# EAGLE board Board (EAGLE 7.1.0)
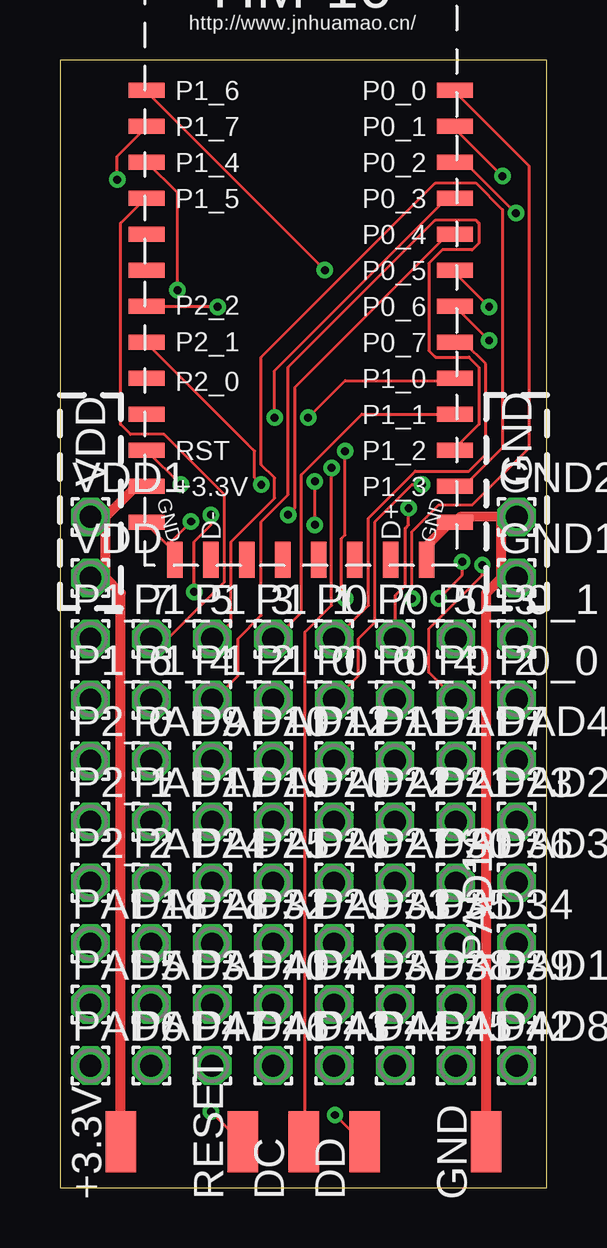
[diagram p0: board, top side]
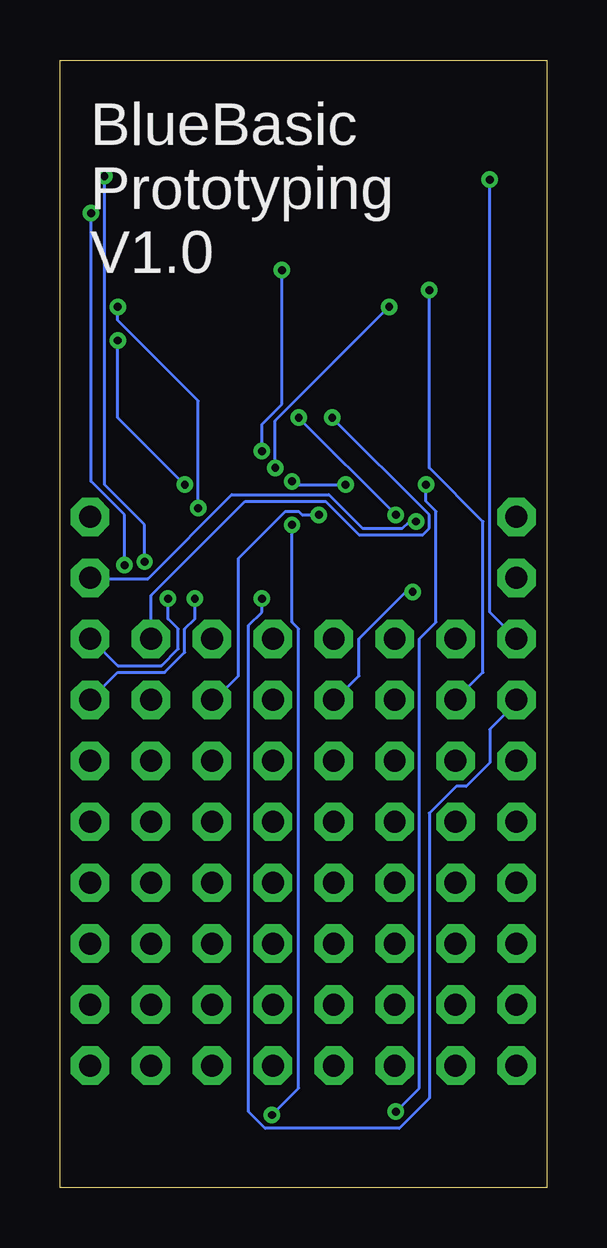
[diagram p1: board, bottom side, seen from below]

Size 20.31 x 46.98 mm. Coordinates in mm from the lower left corner, seen from the top.
Outline: 0,0 20.31,0 20.31,46.98 0,46.98 0,0
Copper layers (1*16): Top 0.0356mm / dielectric 1.5011mm / Bottom 0.0356mm
Design rules "LaenPCBOrder *": minimum track width 5mil, minimum drill 13mil, track to track 6mil, track to pad 6mil, pad to pad 6mil, via to via 6mil, smd to smd 6mil, copper to edge 15mil, drill to drill 6mil, minimum pad ring 7mil, minimum via ring 7mil, stop-mask expansion 3mil, vias tented up to drill 3mil, thermal gap 10mil
vRestrict: area 0,3.8 to 20.3,24.1

## Footprints (pad centres in the part's own frame; a part is rotated, then mirrored left to right if it is on the bottom)
SMD1,27-2,54 = smd 1.27 x 2.54: 1 0,0
26.9X13X2.2_BOARD = smd 1.5 x 0.635: 1 -7.183,0; 2 -7.183,-1.5; 3 -7.183,-3; 4 -7.183,-4.5; 5 -7.183,-6; 6 -7.183,-7.5; 8 -7.183,-10.5; 9 -7.183,-12; 10 -7.183,-13.5; 11 -7.183,-15; 12 -7.183,-16.5; 13 -7.183,-18; 22 5.683,-18; 23 5.683,-16.5; 24 5.683,-15; 25 5.683,-13.5; 26 5.683,-12; 27 5.683,-10.5; 28 5.683,-9; 29 5.683,-7.5; 30 5.683,-6; 31 5.683,-4.5; 32 5.683,-3; 33 5.683,-1.5; 34 5.683,0; $7 -7.183,-9 | smd 0.635 x 1.5: 14 -6,-19.558; 15 -4.5,-19.558; 16 -3,-19.558; 17 -1.5,-19.558; 18 0,-19.558; 19 1.5,-19.558; 20 3,-19.558; 21 4.5,-19.558
1,6/0,9 = drill 0.914 pad 1.6 octagon: 1 0,0

## Placement (x,y rotation side)
+3.3V  [SMD1,27-2,54]  2.54,1.9 0 top
DC  [SMD1,27-2,54]  10.16,1.9 0 top
DD  [SMD1,27-2,54]  12.7,1.9 0 top
E1  HM-10-BOARD  [26.9X13X2.2_BOARD]  10.79,45.72 0 top
GND  [SMD1,27-2,54]  17.78,1.9 0 top
GND1  [1,6/0,9]  19.05,25.4 0 top
GND2  [1,6/0,9]  19.05,27.94 0 top
P0_0  [1,6/0,9]  19.05,20.32 0 top
P0_1  [1,6/0,9]  19.05,22.86 0 top
P0_2  [1,6/0,9]  16.51,20.32 0 top
P0_3  [1,6/0,9]  16.51,22.86 0 top
P0_4  [1,6/0,9]  13.97,20.32 0 top
P0_5  [1,6/0,9]  13.97,22.86 0 top
P0_6  [1,6/0,9]  11.43,20.32 0 top
P0_7  [1,6/0,9]  11.43,22.86 0 top
P1_0  [1,6/0,9]  8.89,20.32 0 top
P1_1  [1,6/0,9]  8.89,22.86 0 top
P1_2  [1,6/0,9]  6.35,20.32 0 top
P1_3  [1,6/0,9]  6.35,22.86 0 top
P1_4  [1,6/0,9]  3.81,20.32 0 top
P1_5  [1,6/0,9]  3.81,22.86 0 top
P1_6  [1,6/0,9]  1.27,20.32 0 top
P1_7  [1,6/0,9]  1.27,22.86 0 top
P2_0  [1,6/0,9]  1.27,17.78 0 top
P2_1  [1,6/0,9]  1.27,15.24 0 top
P2_2  [1,6/0,9]  1.27,12.7 0 top
PAD1  [1,6/0,9]  13.97,17.78 0 top
PAD2  [1,6/0,9]  19.05,15.24 0 top
PAD3  [1,6/0,9]  19.05,12.7 0 top
PAD4  [1,6/0,9]  19.05,17.78 0 top
PAD5  [1,6/0,9]  1.27,7.62 0 top
PAD6  [1,6/0,9]  1.27,5.08 0 top
PAD7  [1,6/0,9]  16.51,17.78 0 top
PAD8  [1,6/0,9]  19.05,5.08 0 top
PAD9  [1,6/0,9]  3.81,17.78 0 top
PAD10  [1,6/0,9]  6.35,17.78 0 top
PAD11  [1,6/0,9]  11.43,17.78 0 top
PAD12  [1,6/0,9]  8.89,17.78 0 top
PAD15  [1,6/0,9]  19.05,7.62 0 top
PAD16  [1,6/0,9]  19.05,10.16 90 top
PAD17  [1,6/0,9]  3.81,15.24 0 top
PAD18  [1,6/0,9]  1.27,10.16 0 top
PAD19  [1,6/0,9]  6.35,15.24 0 top
PAD20  [1,6/0,9]  8.89,15.24 0 top
PAD21  [1,6/0,9]  13.97,15.24 0 top
PAD22  [1,6/0,9]  11.43,15.24 0 top
PAD23  [1,6/0,9]  16.51,15.24 0 top
PAD24  [1,6/0,9]  3.81,12.7 0 top
PAD25  [1,6/0,9]  6.35,12.7 0 top
PAD26  [1,6/0,9]  8.89,12.7 0 top
PAD27  [1,6/0,9]  11.43,12.7 0 top
PAD28  [1,6/0,9]  3.81,10.16 0 top
PAD29  [1,6/0,9]  8.89,10.16 0 top
PAD30  [1,6/0,9]  13.97,12.7 0 top
PAD31  [1,6/0,9]  3.81,7.62 0 top
PAD32  [1,6/0,9]  6.35,10.16 0 top
PAD33  [1,6/0,9]  11.43,10.16 0 top
PAD34  [1,6/0,9]  16.51,10.16 0 top
PAD35  [1,6/0,9]  13.97,10.16 0 top
PAD36  [1,6/0,9]  16.51,12.7 0 top
PAD37  [1,6/0,9]  11.43,7.62 0 top
PAD38  [1,6/0,9]  13.97,7.62 0 top
PAD39  [1,6/0,9]  16.51,7.62 0 top
PAD40  [1,6/0,9]  6.35,7.62 0 top
PAD41  [1,6/0,9]  8.89,7.62 0 top
PAD42  [1,6/0,9]  16.51,5.08 0 top
PAD43  [1,6/0,9]  8.89,5.08 0 top
PAD44  [1,6/0,9]  11.43,5.08 0 top
PAD45  [1,6/0,9]  13.97,5.08 0 top
PAD46  [1,6/0,9]  6.35,5.08 0 top
PAD47  [1,6/0,9]  3.81,5.08 0 top
RESET  [SMD1,27-2,54]  7.62,1.9 0 top
VDD  [1,6/0,9]  1.27,25.4 0 top
VDD1  [1,6/0,9]  1.27,27.94 0 top

## Library data of the parts
+3.3V DC DD GND GND1 GND2 P0_0 P0_1-P0_7 P1_0 P1_1-P1_7 P2_0 P2_1 P2_2 PAD1-PAD12 PAD15-PAD47 RESET VDD VDD1 = wirepad
E1 = JHNuaMao

## Nets
GND: E1.13 E1.14 E1.21 E1.22 GND1.1 GND2.1 GND.1
N$1: E1.28 P0_6.1
N$2: E1.27 P0_7.1
N$3: E1.11 RESET.1
N$4: DC.1 E1.$7
N$5: DD.1 E1.8
N$6: E1.23 P1_3.1
N$7: E1.24 P1_2.1
N$8: E1.25 P1_1.1
N$9: E1.31 P0_3.1
N$10: E1.30 P0_4.1
N$11: E1.29 P0_5.1
N$12: E1.26 P1_0.1
N$13: E1.2 P1_7.1
N$14: E1.1 P1_6.1
N$15: E1.4 P1_5.1
N$16: E1.3 P1_4.1
N$18: E1.32 P0_2.1
P0_0: E1.34 P0_0.1
P0_1: E1.33 P0_1.1
VDD: +3.3V.1 E1.12 VDD1.1 VDD.1

## Tracks (layer width: path | path; a pad name or v marks a point on that pad's centre or on a via)
GND  (via drill 0.33)
  Top 0.127: 4.48,26.77 3.65,27.61 E1.13 | 4.48,26.77 4.76,26.49 4.76,26.21 E1.14 4.48,26.77 | 15.24,26.67 15.24,26.21 E1.21 | 18.41,25.4 18.59,25.38 19.01,25.38 GND1.1 | v5.46,27.75 4.48,26.77 | GND2.1 19.01,28.03 18.59,28.03 18.41,27.94
  Top 0.406: GND.1 17.78,24.76 18.41,25.4 18.41,27.94 16.7,27.94 E1.22 16.29,27.72 15.24,26.67
  Bottom 0.127: v5.46,27.75 5.74,27.75 6.02,27.47 7.7,27.47 9.09,28.87 13.14,28.87 16.64,25.38 19.01,25.38 GND1.1
N$1  (via drill 0.33)
  Top 0.127: v17.89,35.29 16.5,36.69 E1.28 | v15.1,29.29 14.68,29.29 13.14,27.75 13.14,23.56 12.45,22.86 12.45,21.32 11.47,20.34 P0_6.1
  Bottom 0.127: v17.89,35.29 17.89,32.08 v15.1,29.29
N$2
  Top 0.127: E1.27 16.5,35.15 16.92,35.15 17.75,34.31 17.75,30.54 17.06,29.84 14.82,29.84 12.87,27.89 12.87,24.26 11.47,22.86 P0_7.1
N$3  (via drill 0.33)
  Top 0.127: v5.04,29.29 3.65,30.68 E1.11 | v6.3,3.16 7.56,1.9 RESET.1
  Bottom 0.127: v5.04,29.29 5.04,28.59 4.62,28.17 4.62,23.56 5.32,22.86 5.32,4.14 v6.3,3.16
N$4  (via drill 0.33)
  Top 0.127: v6.58,36.69 3.65,36.69 E1.$7 | v11.33,29.98 11.33,24.26 10.21,23.14 10.21,1.9 DC.1
  Bottom 0.127: v6.58,36.69 11.33,31.94 v11.33,29.98
N$5  (via drill 0.33)
  Top 0.127: v8.39,29.29 8.12,29.57 8.12,30.68 3.65,35.15 E1.8 | v10.63,27.61 v10.63,29.43 | v11.47,3.02 12.59,1.9 DD.1
  Bottom 0.127: v8.39,29.29 10.49,29.29 v10.63,29.43 | v10.63,27.61 10.63,23.56 10.35,23.28 10.35,4.14 v11.47,3.02
N$6
  Top 0.127: E1.23 16.5,29.29 16.92,29.29 18.45,30.82 18.45,40.74 17.34,41.86 15.66,41.86 8.39,34.59 8.39,30.12 8.95,29.57 8.95,28.73 7.14,26.91 7.14,23.56 6.44,22.86 P1_3.1
N$7
  Top 0.127: E1.24 16.5,30.82 17.47,31.8 17.47,34.18 17.06,34.59 15.66,34.59 15.38,34.87 15.38,38.51 15.94,39.06 17.2,39.06 17.47,39.34 17.47,40.18 17.34,40.32 15.66,40.32 9.51,34.18 9.51,28.87 8.39,27.75 8.39,23.84 7.42,22.86 7.42,21.32 6.44,20.34 P1_2.1
N$8
  Top 0.127: E1.25 16.36,32.22 12.59,32.22 10.07,29.7 10.07,23.98 8.95,22.86 P1_1.1
N$9  (via drill 0.33)
  Top 0.127: v8.95,32.08 8.95,34.04 16.08,41.16 16.36,41.16 E1.31
  Bottom 0.127: v8.95,32.08 4.9,28.03 4.9,27.47 5.18,27.19 7.84,27.19 9.23,28.59 12.59,28.59 16.5,24.68 16.5,22.86 P0_3.1
N$10  (via drill 0.33)
  Top 0.127: v9.51,28.03 9.79,28.31 9.79,33.34 16.08,39.62 16.36,39.62 E1.30
  Bottom 0.127: v9.51,28.03 10.21,28.03 10.35,28.17 10.91,28.17 12.87,26.21 12.87,21.32 13.84,20.34 P0_4.1
N$11  (via drill 0.33)
  Top 0.127: v17.89,36.69 16.5,38.09 E1.29 | v14.54,28.31 14.54,27.61 14.4,27.47 14.4,25.09 13.98,24.68 13.98,22.86 P0_5.1
  Bottom 0.127: v17.89,36.69 17.89,36.13 14.54,32.78 v14.54,28.31
N$12  (via drill 0.33)
  Top 0.127: v10.35,32.08 11.89,33.62 16.36,33.62 E1.26 | v6.3,28.03 6.3,27.61 5.6,26.91 v5.6,24.82
  Bottom 0.127: v6.3,28.03 v10.35,32.08 | v5.6,24.82 5.88,24.82 7.84,22.86 7.84,21.32 8.81,20.34 P1_0.1
N$13  (via drill 0.33)
  Top 0.127: v2.39,42 2.39,42.98 3.5,44.09 E1.2
  Bottom 0.127: v2.39,42 2.39,23.98 P1_7.1
N$14  (via drill 0.33)
  Top 0.127: v11.05,38.23 3.65,45.63 E1.1 | v11.89,30.68 11.89,27.19 11.75,27.05 11.75,24.68 v11.89,24.54
  Bottom 0.127: v11.05,38.23 11.05,32.64 11.89,31.8 v11.89,30.68 | v11.89,24.54 11.89,23.98 12.45,23.42 12.45,3.16 11.75,2.46 6.16,2.46 4.9,3.72 4.9,15.6 3.79,16.71 3.37,16.71 2.39,17.69 2.39,19.09 1.27,20.21 P1_6.1
N$15
  Top 0.127: P1_5.1 4.48,22.86 6.86,25.23 6.86,28.87 4.34,31.38 2.95,31.38 2.53,31.8 2.53,40.18 3.5,41.16 E1.4
N$16  (via drill 0.33)
  Top 0.127: v4.9,37.39 4.9,41.44 3.65,42.7 E1.3
  Bottom 0.127: v4.9,37.39 4.9,29.98 2.67,27.75 2.67,21.46 P1_4.1
N$18  (via drill 0.33)
  Top 0.127: v19.01,40.6 16.92,42.7 16.5,42.7 E1.32 | v17.61,25.93 17.61,25.51 15.38,23.28 15.38,21.46 16.5,20.34 P0_2.1
  Bottom 0.127: v19.01,40.6 19.01,29.43 17.61,28.03 v17.61,25.93
P0_0  (via drill 0.33)
  Top 0.127: v14.68,24.54 14.68,27.33 15.8,28.45 17.2,28.45 19.57,30.82 19.57,42.56 16.5,45.63 E1.34
  Bottom 0.127: v14.68,24.54 14.68,23.7 15.1,23.28 15.1,22.3 15.94,21.46 17.89,21.46 19.01,20.34 P0_0.1
P0_1  (via drill 0.33)
  Top 0.127: v18.45,42.14 16.5,44.09 E1.33 | v16.78,26.07 16.78,25.51 v15.8,24.54
  Bottom 0.127: v18.45,42.14 18.45,29.29 16.78,27.61 v16.78,26.07 | v15.8,24.54 15.8,23.7 15.38,23.28 15.38,22.44 16.08,21.74 17.89,21.74 19.01,22.86 P0_1.1
VDD
  Top 0.127: E1.12 3.5,29.29 3.37,29.29 3.17,29.21 | 1.91,25.4 1.83,25.38 1.27,25.38 VDD.1 | VDD1.1 1.27,28.03 1.83,28.03 1.91,27.94
  Top 0.406: +3.3V.1 2.54,24.76 1.91,25.4 1.91,27.94 3.17,29.21

## Text on the board
tPlace: VDD | GND
bPlace: BlueBasic / Prototyping / V1.0